# Altium PCB Rpi LED Indicator.PcbDoc
Units mm, origin at the board's own origin, x right, y up, seen from the top; angles counter-clockwise.
Board outline 30.2 x 16.23 mm, 2 copper layers (Top Layer, Bottom Layer); 10 components, 9 nets, 34 pads, 5 vias.
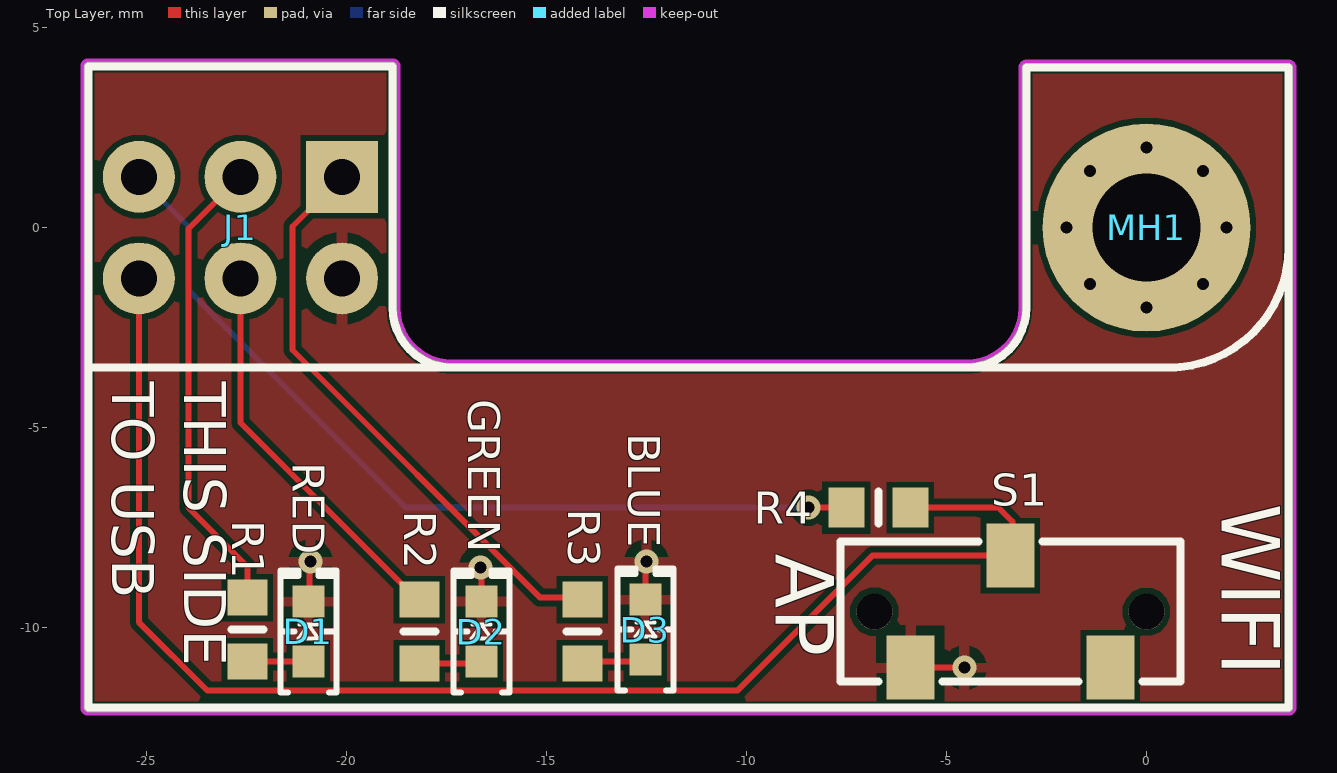
[diagram p0: Top Layer view]
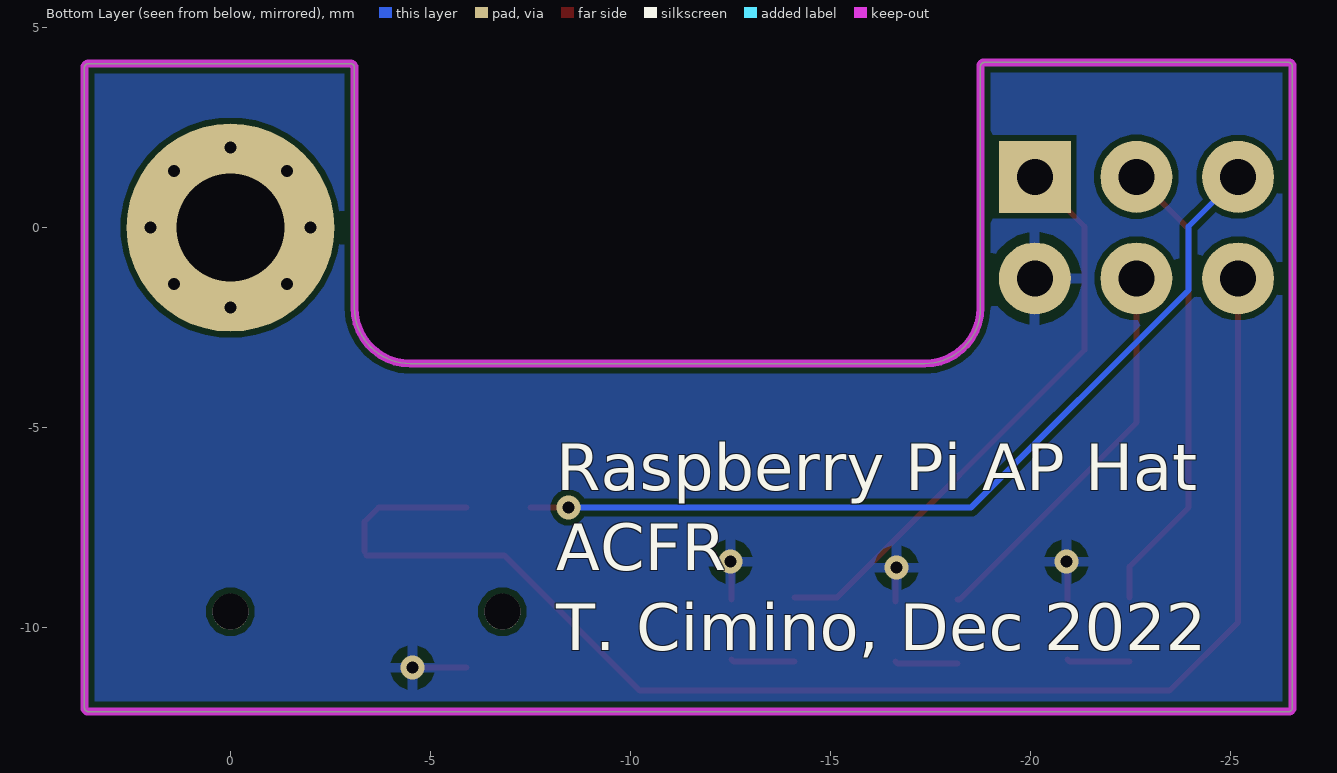
[diagram p1: Bottom Layer view, seen from below]

## Layer stack, top to bottom
Top Solder: solder mask 0.0102, Solder Resist, Dk 3.5
Top Layer: signal copper 0.0356
Dielectric 1: dielectric 0.32, FR-4, Dk 4.8
Bottom Layer: signal copper 0.0356
Bottom Solder: solder mask 0.0102, Solder Resist, Dk 3.5

## Board outline
-26.55,-12 ccw(c-26.45,-12) -26.45,-12.1 3.55,-12.1 ccw(c3.55,-12) 3.65,-12 3.65,4 ccw(c3.55,4) 3.55,4.1 -3,4.1 ccw(c-3,4) -3.1,4 -3.1,-2 -3.1,-2.001 cw(c-4.5,-2) -4.499,-3.4 -17.352,-3.4 cw(c-17.35,-2) -18.75,-2.001 -18.75,-2 -18.75,4.03 ccw(c-18.85,4.03) -18.85,4.13 -26.45,4.13 ccw(c-26.45,4.03) -26.55,4.03

## Design rules (kind name [scope] priority, off if disabled: settings)
BoardOutlineClearance [All] p1: gap=0.15 ignorepadtopadclearanceinfootprint=FALSE
Clearance [All] p1: gap=0.15 ignorepadtopadclearanceinfootprint=FALSE
ComponentClearance [All] p1: gap=0.1 collisioncheckmode=3 verticalgap=0.1 showdistances=FALSE
HoleSize [All] p1: absolutevalues=TRUE maxlimit=3.2 minlimit=0.025 maxpercent=80.000 minpercent=20.000
HoleToHoleClearance [All] p1: gap=0.1 allowstackedmicrovias=FALSE
MinimumSolderMaskSliver [All] p1: minsoldermaskwidth=0.1
PolygonConnect [All] p1: connectstyle=Relief reliefconductorwidth=0.254 reliefentries=4 polygonreliefangle="90 Angle" airgapwidth=0.254
RoutingVias [All] p1: holewidth=0.3 width=0.6 viastyle="Through Hole" minholewidth=0.3 minwidth=0.6 maxholewidth=0.3 maxwidth=0.6
SilkToSilkClearance [All] p1: silktosilkclearance=0.1
SilkToSolderMaskClearance [IsPad] p1: minsilkscreentomaskgap=0.1 clearancetoexposedcopper=TRUE
SolderMaskExpansion [All] p1: expansion=0.102 istentingtop=FALSE
Width [All] p1: maxlimit=0.5 minlimit=0.15 preferedwidth=0.15
24 further rules are at their usual default settings.

## Components (designator, comment, footprint, x,y, rotation, side; value= is the part's Value field where it differs from the comment)
D1 "RED" "LED 0603_1608 RED" -20.95,-10.1 r90 top value=Red
D2 "GREEN" "LED 0603_1608 GREEN" -16.625,-10.1 r90 top value=Green
D3 "BLUE" "LED 0603_1608 BLUE" -12.525,-10.05 r90 top value=Blue
J1 "Rpi" "2.54mm header female 6POS" -20.11,1.27 r0 top
MH1 "AUX_1" "M2.5 Mounting Hole" 0,0 r0 top
R1 "Res 0603" 0603_R -22.475,-10.05 r270 top value=???
R2 "Res 0603" 0603_R -18.175,-10.1 r270 top value=???
R3 "Res 0603" 0603_R -14.1,-10.1 r270 top value=???
R4 "Res 0603" 0603_R -6.7,-7 r0 top value=10k
S1 "Switch SDPT" "SWITCH NIDEC COPAL CL-SB-12A-11T" -3.4,-9.6 r0 top

## Footprints (in the part's own frame and the unit in brackets; to place one, negate y for a bottom-side part, rotate by r counter-clockwise, add the part's x,y. Pads: shape width x height; smd on the part's side, far side on the other; paste and mask are expansions set on the pad)
"2.54mm header female 6POS" [mm]
  rect 1.8x1.8 / inner round 1.8 / far side rect 1.8x1.8 hole 0.9: 1(0,0)
  round 1.8 hole 0.9: 2(0,-2.54) 3(-2.54,0) 4(-2.54,-2.54) 5(-5.08,0) 6(-5.08,-2.54)
0603_R [mm]
  rect 0.9x1 smd: 1(-0.8,0) 2(0.8,0)
  silkscreen extent 0,-0.4 0,0.4, body extent -0.8,-0.4 0.8,0.4, height 0.45
"LED 0603_1608 BLUE" [mm] "Chip Diode, 2-Leads, Body 1.60x0.80mm, IPC Medium Density"
  rect 0.8x0.8 smd: 1(-0.75,0) 2(0.75,0)
  silkscreen extent -1.52,-0.7 1.52,0.7, body extent -0.8,-0.4 0.8,0.4, height 0.53
"LED 0603_1608 GREEN" [mm] "Chip Diode, 2-Leads, Body 1.60x0.80mm, IPC Medium Density"
  rect 0.8x0.8 smd: 1(-0.75,0) 2(0.75,0)
  silkscreen extent -1.52,-0.7 1.52,0.7, body extent -0.8,-0.4 0.8,0.4, height 0.53
"LED 0603_1608 RED" [mm] "Chip Diode, 2-Leads, Body 1.60x0.80mm, IPC Medium Density"
  rect 0.8x0.8 smd: 1(-0.75,0) 2(0.75,0)
  silkscreen extent -1.52,-0.7 1.52,0.7, body extent -0.8,-0.4 0.8,0.4, height 0.53
"M2.5 Mounting Hole" [mm]
  round 0.3 hole 0.3: 1(-2,0) 1(-1.414,-1.414) 1(-1.414,1.414) 1(0,-2) 1(0,2) 1(1.414,-1.414) 1(1.414,1.414) 1(2,0)
  round 5.2 hole 2.7: 1(0,0)
"SWITCH NIDEC COPAL CL-SB-12A-11T" [mm]
  round 0.9 hole 0.9 unplated: 0(-3.4,0) 0(3.4,0)
  rect 1.2x1.6 smd: 1(-2.5,-1.4) 2(0,1.4) 3(2.5,-1.4)
  silkscreen extent -4.25,-1.75 4.25,1.75, body extent -4.25,-3.75 4.25,1.75, height 3.5

## Part data
D1: library part 5973005507F, "LED RED 0603 SMD", Color=Red, Current - Test=20mA, Device Package="0603 (1608 Metric)", Lens Color=0.68mm, Manufacturer=Dialight, Millicandela Rating=90mcd, Supplier Device Package=0603, Supplier Part Number 1=350-4374-1-ND, Voltage - Forward (Vf) (Typ)=2V, ComponentLink1Description=Datasheet, ComponentLink1URL=http://www.dialightsignalsandcomponents.com/Assets/Drawings/2D_Drawings_DrawingDetailedSpec/NewDrawings/18369A.pdf, ComponentLink2Description="DigiKey Link", ComponentLink2URL=http://digikey.com/product-detail/en/dialight/5973005507F/350-4374-1-ND/9385480, Configuration=Standard, Height (Max)=0.68mm, LastUpdated="2/09/2020 01:20:57", Lens Size="1.20mm x 0.80mm", Lens Style="Rectangle with Flat Top", Lifecycle Status=Active, Minimum Order=1, Mounting Type="Surface Mount", Package / Case="0603 (1608 Metric)", Packaging=TapeAndReel, Part Number=5973005507F, Part Status=Active, PartId=378, Price=0.11, Series=597, Size / Dimension="1.60mm L x 0.80mm W", Supplier 1=DigiKey, Wavelength - Dominant=630nm
D2: library part HSMG-C197, "LED GREEN DIFFUSED CHIP SMD", Color=Green, Current - Test=20mA, Device Package="0603 (1608 Metric)", Lens Color=White, Manufacturer="Broadcom Limited", Millicandela Rating=15mcd, Supplier Device Package="Chip LED", Supplier Part Number 1=516-2830-1-ND, Voltage - Forward (Vf) (Typ)=2.2V, ComponentLink1Description=Datasheet, ComponentLink1URL=https://docs.broadcom.com/docs/AV02-0551EN, ComponentLink2Description="DigiKey Link", ComponentLink2URL=http://digikey.com/product-detail/en/broadcom-limited/HSMG-C197/516-2830-1-ND/3909267, Configuration=Standard, Height (Max)=0.40mm, LastUpdated="21/01/2020 03:12:15", Lens Size="1.60mm x 0.80mm", Lens Style="Rectangle with Flat Top", Lens Transparency=Diffused, Lifecycle Status=Active, Minimum Order=1, Mounting Type="Surface Mount", Package / Case="0603 (1608 Metric)", Packaging=TapeAndReel, Part Number=HSMG-C197, Part Status=Active, PartId=585, Price=0.08, Series=-, Size / Dimension="1.60mm L x 0.80mm W", Supplier 1=DigiKey, Viewing Angle=130°, Wavelength - Dominant=572nm, Wavelength - Peak=570nm
D3: library part 5973604507F, "LED BLUE 0603 SMD", Color=Blue, Current - Test=5mA, Device Package="0603 (1608 Metric)", Lens Color=0.68mm, Manufacturer=Dialight, Millicandela Rating=40mcd, Supplier Device Package=0603, Supplier Part Number 1=350-4381-1-ND, Voltage - Forward (Vf) (Typ)=2.9V, ComponentLink1Description=Datasheet, ComponentLink1URL=http://www.dialightsignalsandcomponents.com/Assets/Drawings/2D_Drawings_DrawingDetailedSpec/NewDrawings/C18367A.pdf, ComponentLink2Description="DigiKey Link", ComponentLink2URL=http://digikey.com/product-detail/en/dialight/5973604507F/350-4381-1-ND/9385487, Configuration=Standard, Height (Max)=0.68mm, LastUpdated="2/09/2020 01:20:26", Lens Size="1.20mm x 0.80mm", Lens Style="Rectangle with Flat Top", Lifecycle Status=Active, Minimum Order=1, Mounting Type="Surface Mount", Package / Case="0603 (1608 Metric)", Packaging=TapeAndReel, Part Number=5973604507F, Part Status=Active, PartId=822, Price=0.16, Series=597, Size / Dimension="1.60mm L x 0.80mm W", Supplier 1=DigiKey, Wavelength - Dominant=470nm
J1: library part "Rpi 2x3 header"
MH1: library part "Mounting Hole"
S1: "SWITCH SLIDE SPDT"
R1 R2 R3 R4: PackageDescription="0603 Resistor"

## Via types
v1: diameter 0.6, hole 0.3, Top Layer to Bottom Layer, tented both sides, 5 vias

## Nets (pads, with @x,y where several pads share a name; then routed paths per layer and width w, separated by ;. In a path a pad name is that pad's centre, name@x,y a point inside that pad or via, vN(x,y) a via of type N, cw(c..) or ccw(c..) an arc to the next point about the centre after c; other vN are vias at no path point)
3V3: J1.5 R4.1 | length 22
  Top Layer w0.15: v1(-8.45,-7) R4.1
  Bottom Layer w0.15: J1.5 -23.95,0.03 -23.95,-1.561 -18.511,-7 v1(-8.45,-7)
GND: D1.2 D2.2 D3.2 J1.2 S1.1 | length 4.1
  Top Layer w0.15: D1.2@-20.925,-9.3 -20.925,-8.375 v1(-20.9,-8.35) ; v1(-16.65,-8.5) -16.625,-8.525 D2.2 ; D3.2 -12.525,-8.375 v1(-12.5,-8.35) ; S1.1 v1(-4.55,-11)
LED_1: J1.3 R1.1 | length 11.7
  Top Layer w0.15: J1.3 -23.95,-0.03 -23.95,-7 -22.475,-8.475 R1.1
LED_2: J1.4 R2.1 | length 9.9
  Top Layer w0.15: J1.4 -22.65,-4.875 -18.225,-9.3 R2.1
LED_3: J1.1 R3.1 | length 14.7
  Top Layer w0.15: J1.1 -21.35,0.03 -21.35,-3.058 -15.158,-9.25 R3.1@-14.1,-9.25
NetD1_1: D1.1 R1.2 | length 1.6
  Top Layer w0.15: R1.2 -20.975,-10.85 D1.1@-20.925,-10.8
NetD2_1: D2.1 R2.2 | length 1.6
  Top Layer w0.15: R2.2 -16.675,-10.9 D2.1
NetD3_1: D3.1 R3.2 | length 1.6
  Top Layer w0.15: R3.2@-14.1,-10.85 -12.575,-10.85 D3.1
SWITCH: J1.6 R4.2 S1.2 | length 35.9
  Top Layer w0.15: J1.6 -25.19,-9.86 -23.475,-11.575 -10.228,-11.575 -6.853,-8.2 S1.2 ; R4.2 -3.7,-7 -3.35,-7.35 S1.2@-3.35,-8.1
pads on no net: MH1.1 S1.0 S1.3

## Polygon pours and split planes (outlines as drawn)
GND on Top Layer "GND_L01_P000" (solid, pour order 0): 3.55,-12 3.55,4 -26.45,4 -26.45,-12
GND on Bottom Layer "GND_L02_P002" (solid, pour order 2): 3.55,-12 3.55,4 -26.45,4 -26.45,-12

## Keep-outs
Keep-Out Layer:
  the board outline again, w0.2

## Silkscreen, mask and mechanical layers (free items; w line width, h text height)
Top Overlay:
  lines w0.2: -17.35,-3.5 cw(c-17.35,-2) -18.85,-2 -18.85,4.03 -26.45,4.03 -26.45,-3.5 ; -4.5,-3.5 ccw(c-4.5,-2) -3,-2 -3,4 3.55,4 3.55,-1.02 ; 0.55,-3.5 ccw(c0.55,-0.5) 3.55,-0.5 ; 0.73,-3.5 -26.45,-3.5 ; 3.55,-0.52 3.55,-12 -26.45,-12 -26.45,-3.5
  text "THIS SIDE / TO USB" at -26.2,-3.85 h1.8 r270
  text "WIFI" at 1.4,-6.9 h2.5 r270
  text "AP" at -9.75,-8.15 h2.5 r270
Bottom Overlay:
  text "Raspberry Pi AP Hat / ACFR / T. Cimino, Dec 2022" at -8.15,-10.95 h2